# Altium PCB UPS_Charger_v1.PcbDoc
Units mm, origin at the board's own origin, x right, y up, seen from the top; angles counter-clockwise.
Board outline 152.4 x 101.6 mm, 2 copper layers (F.Cu, B.Cu); 78 components, 42 nets, 240 pads, 288 vias.
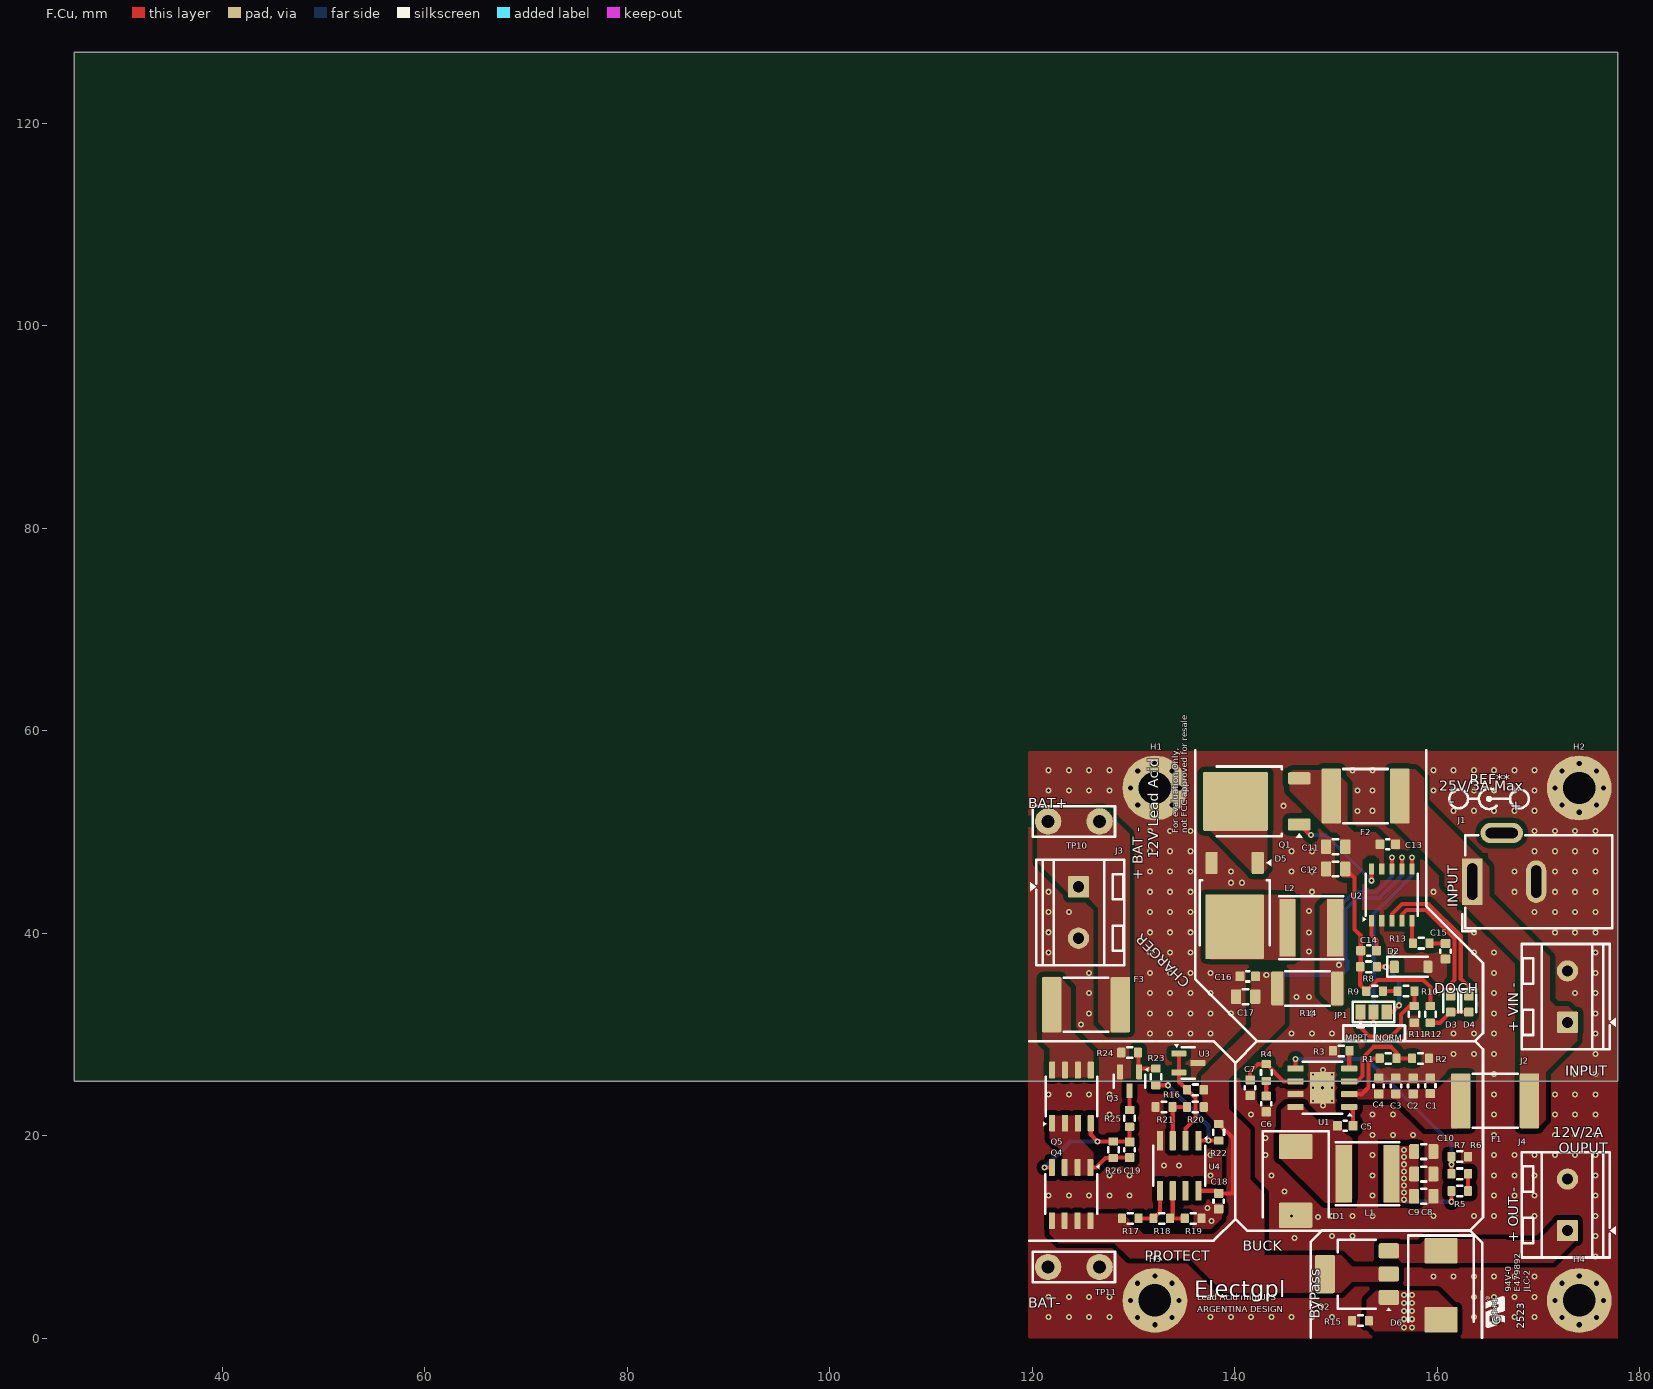
[diagram p0: F.Cu view]
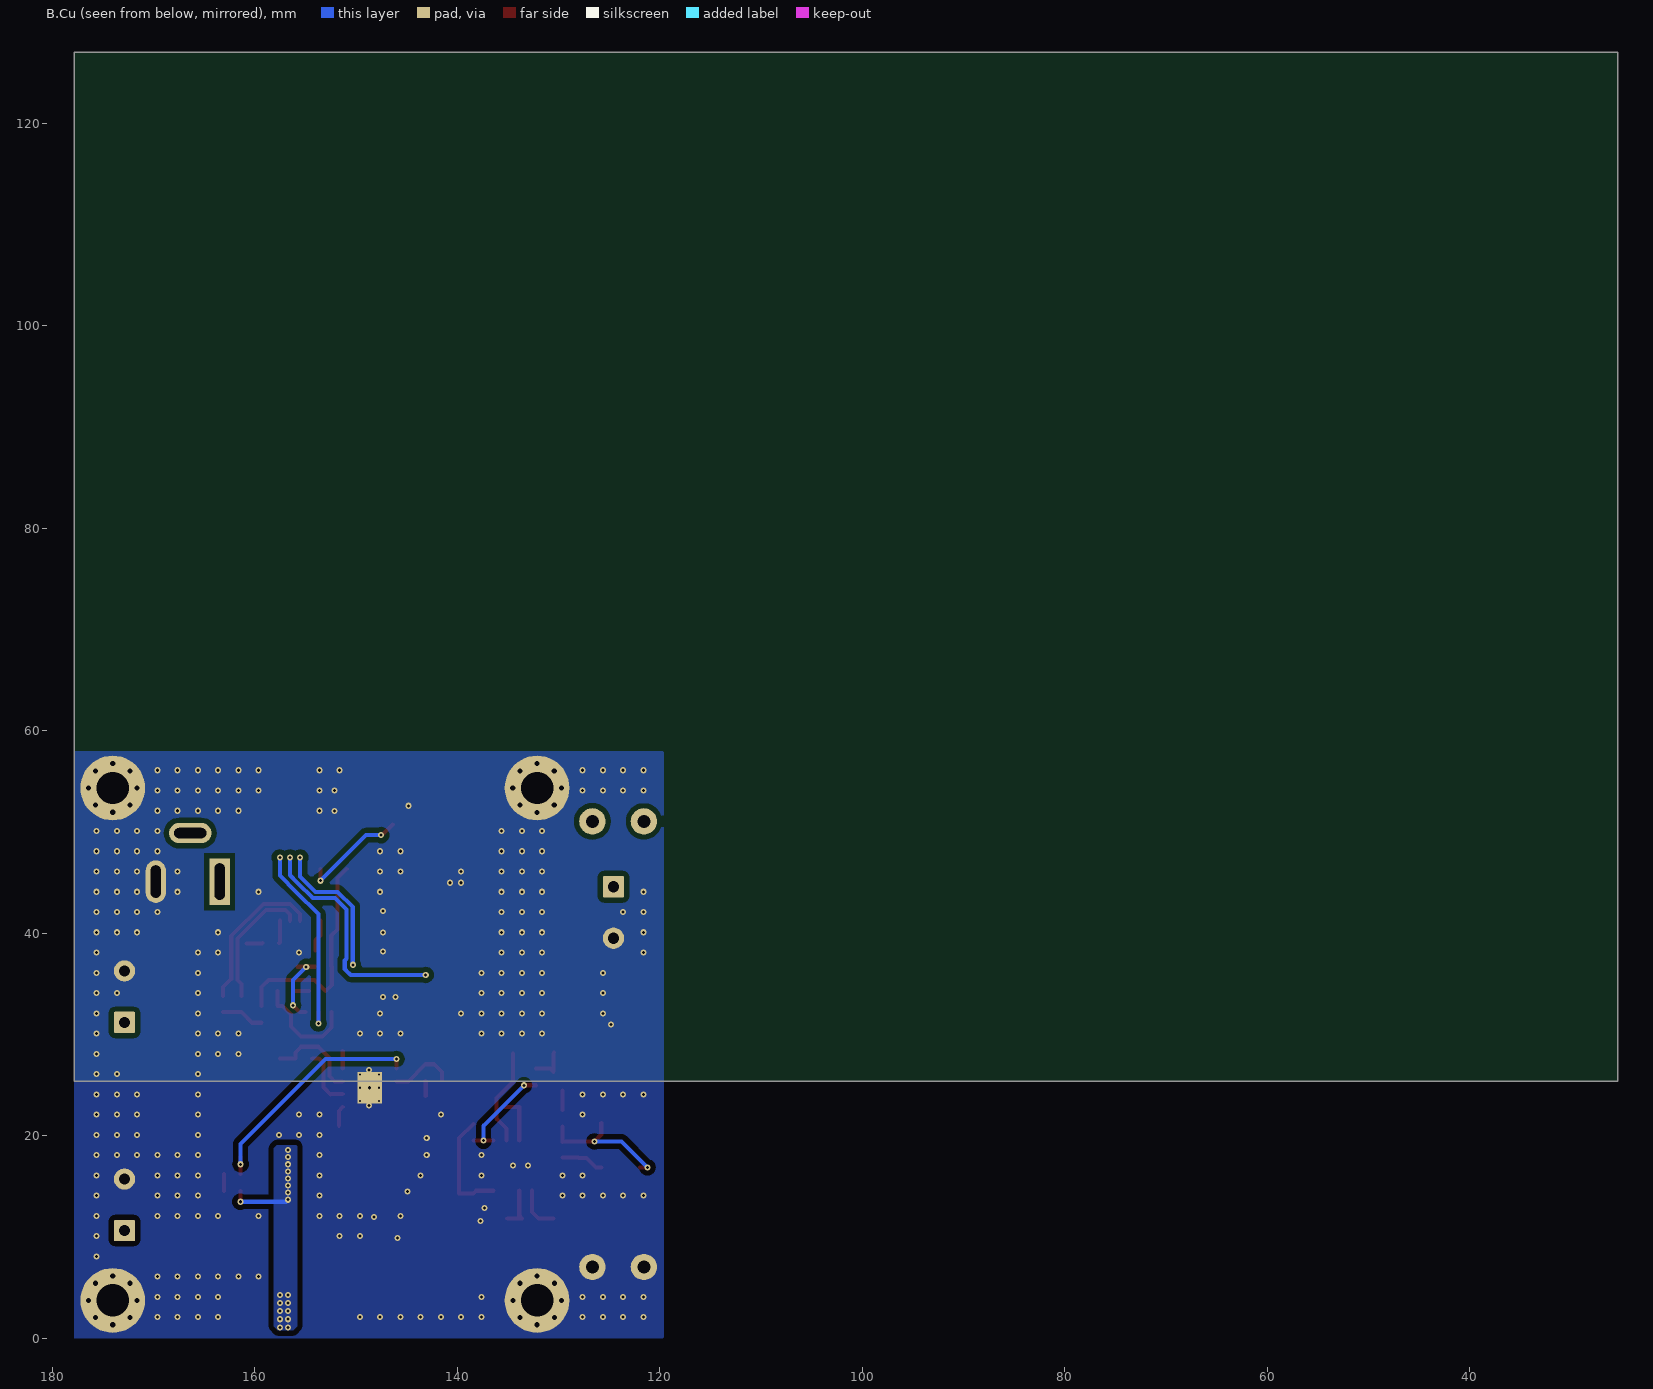
[diagram p1: B.Cu view, seen from below]

## Layer stack, top to bottom
F.Mask: solder mask 0.0102, Solder Resist, Dk 3.5
F.Cu: signal copper 0.0356
Dielectric 1: dielectric 0.32, FR-4, Dk 4.8
B.Cu: signal copper 0.0356
B.Mask: solder mask 0.0102, Solder Resist, Dk 3.5

## Board outline
25.4,25.4 177.8,25.4 177.8,127 25.4,127

## Design rules (kind name [scope] priority, off if disabled: settings)
Clearance "Clearence 0,5_Polygon" [InNamedPolygon('F.Cu-/Battery Protect/BAT+') OR InNamedPolygon('F.Cu-/ByPass/OUTBP') OR InNamedPolygon('F.Cu-Net-(D1-K)') OR InNamedPolygon('F.Cu-Net-(C19-Pad2)') OR InNamedPolygon('F.Cu-Net-(U1-VIN)') OR InNamedPolygon('F.Cu-Net-(F3-Pad2)') OR InNamedPolygon('F.Cu-Net-(D5-K)') OR InNamedPolygon('F.Cu-Net-(Q1-S)') OR InNamedPolygon('F.Cu-/Battery Protect/P+') OR InNamedPolygon('F.Cu-/Buck/VIN') OR InNamedPolygon('F.Cu-Net-(Q1-D)') OR InNamedPolygon('F.Cu-Net-(Q1-S)-1') OR InNamedPolygon('F.Cu-/Buck/VIN-1') OR InNamedPolygon('F.Cu-+12V') OR InNamedPolygon('F.Cu-+12V-1') OR InNamedPolygon('F.Cu-/Battery Protect/P+-1') OR InNamedPolygon('F.Cu-Net-(U2-CSP)') OR InNamedPolygon('F.Cu-/Buck/VIN-2') OR InNamedPolygon('F.Cu-GND') OR InNamedPolygon('B.Cu-GND') OR InNamedPolygon('B.Cu-+12V')] p1: gap=0.5 ignorepadtopadclearanceinfootprint=FALSE
MinimumSolderMaskSliver [All] p1: minsoldermaskwidth=0
PolygonConnect Polygon_B.Cu-+12V_ConnectDirect [IsNamedPolygon('B.Cu-+12V')] p1: connectstyle=Direct reliefconductorwidth=0.254 reliefentries=4 polygonreliefangle="90 Angle" airgapwidth=0.254
PolygonConnect Polygon_B.Cu-GND_ConnectDirect [IsNamedPolygon('B.Cu-GND')] p2: connectstyle=Direct reliefconductorwidth=0.254 reliefentries=4 polygonreliefangle="90 Angle" airgapwidth=0.254
PolygonConnect Polygon_F.Cu-GND_ConnectDirect [IsNamedPolygon('F.Cu-GND')] p3: connectstyle=Direct reliefconductorwidth=0.254 reliefentries=4 polygonreliefangle="90 Angle" airgapwidth=0.254
PolygonConnect Polygon_F.Cu-/Buck/VIN-2_ConnectDirect [IsNamedPolygon('F.Cu-/Buck/VIN-2')] p4: connectstyle=Direct reliefconductorwidth=0.254 reliefentries=4 polygonreliefangle="90 Angle" airgapwidth=0.254
PolygonConnect Polygon_F.Cu-Net-(U2-CSP)_ConnectDirect [IsNamedPolygon('F.Cu-Net-(U2-CSP)')] p5: connectstyle=Direct reliefconductorwidth=0.254 reliefentries=4 polygonreliefangle="90 Angle" airgapwidth=0.254
PolygonConnect "Polygon_F.Cu-/Battery Protect/P+-1_ConnectDirect" [IsNamedPolygon('F.Cu-/Battery Protect/P+-1')] p6: connectstyle=Direct reliefconductorwidth=0.254 reliefentries=4 polygonreliefangle="90 Angle" airgapwidth=0.254
PolygonConnect Polygon_F.Cu-+12V-1_ConnectDirect [IsNamedPolygon('F.Cu-+12V-1')] p7: connectstyle=Direct reliefconductorwidth=0.254 reliefentries=4 polygonreliefangle="90 Angle" airgapwidth=0.254
PolygonConnect Polygon_F.Cu-+12V_ConnectDirect [IsNamedPolygon('F.Cu-+12V')] p8: connectstyle=Direct reliefconductorwidth=0.254 reliefentries=4 polygonreliefangle="90 Angle" airgapwidth=0.254
PolygonConnect Polygon_F.Cu-/Buck/VIN-1_ConnectDirect [IsNamedPolygon('F.Cu-/Buck/VIN-1')] p9: connectstyle=Direct reliefconductorwidth=0.254 reliefentries=4 polygonreliefangle="90 Angle" airgapwidth=0.254
PolygonConnect Polygon_F.Cu-Net-(Q1-S)-1_ConnectDirect [IsNamedPolygon('F.Cu-Net-(Q1-S)-1')] p10: connectstyle=Direct reliefconductorwidth=0.254 reliefentries=4 polygonreliefangle="90 Angle" airgapwidth=0.254
PolygonConnect Polygon_F.Cu-Net-(Q1-D)_ConnectDirect [IsNamedPolygon('F.Cu-Net-(Q1-D)')] p11: connectstyle=Direct reliefconductorwidth=0.254 reliefentries=4 polygonreliefangle="90 Angle" airgapwidth=0.254
PolygonConnect Polygon_F.Cu-/Buck/VIN_ConnectDirect [IsNamedPolygon('F.Cu-/Buck/VIN')] p12: connectstyle=Direct reliefconductorwidth=0.254 reliefentries=4 polygonreliefangle="90 Angle" airgapwidth=0.254
PolygonConnect "Polygon_F.Cu-/Battery Protect/P+_ConnectDirect" [IsNamedPolygon('F.Cu-/Battery Protect/P+')] p13: connectstyle=Direct reliefconductorwidth=0.254 reliefentries=4 polygonreliefangle="90 Angle" airgapwidth=0.254
PolygonConnect Polygon_F.Cu-Net-(Q1-S)_ConnectDirect [IsNamedPolygon('F.Cu-Net-(Q1-S)')] p14: connectstyle=Direct reliefconductorwidth=0.254 reliefentries=4 polygonreliefangle="90 Angle" airgapwidth=0.254
PolygonConnect Polygon_F.Cu-Net-(D5-K)_ConnectDirect [IsNamedPolygon('F.Cu-Net-(D5-K)')] p15: connectstyle=Direct reliefconductorwidth=0.254 reliefentries=4 polygonreliefangle="90 Angle" airgapwidth=0.254
PolygonConnect Polygon_F.Cu-Net-(F3-Pad2)_ConnectDirect [IsNamedPolygon('F.Cu-Net-(F3-Pad2)')] p16: connectstyle=Direct reliefconductorwidth=0.254 reliefentries=4 polygonreliefangle="90 Angle" airgapwidth=0.254
PolygonConnect Polygon_F.Cu-Net-(U1-VIN)_ConnectDirect [IsNamedPolygon('F.Cu-Net-(U1-VIN)')] p17: connectstyle=Direct reliefconductorwidth=0.254 reliefentries=4 polygonreliefangle="90 Angle" airgapwidth=0.254
PolygonConnect Polygon_F.Cu-Net-(C19-Pad2)_ConnectDirect [IsNamedPolygon('F.Cu-Net-(C19-Pad2)')] p18: connectstyle=Direct reliefconductorwidth=0.254 reliefentries=4 polygonreliefangle="90 Angle" airgapwidth=0.254
PolygonConnect Polygon_F.Cu-Net-(D1-K)_ConnectDirect [IsNamedPolygon('F.Cu-Net-(D1-K)')] p19: connectstyle=Direct reliefconductorwidth=0.254 reliefentries=4 polygonreliefangle="90 Angle" airgapwidth=0.254
PolygonConnect Polygon_F.Cu-/ByPass/OUTBP_ConnectDirect [IsNamedPolygon('F.Cu-/ByPass/OUTBP')] p20: connectstyle=Direct reliefconductorwidth=0.254 reliefentries=4 polygonreliefangle="90 Angle" airgapwidth=0.254
PolygonConnect "Polygon_F.Cu-/Battery Protect/BAT+_ConnectDirect" [IsNamedPolygon('F.Cu-/Battery Protect/BAT+')] p21: connectstyle=Direct reliefconductorwidth=0.254 reliefentries=4 polygonreliefangle="90 Angle" airgapwidth=0.254
RoutingVias [All] p1: holewidth=0.711 width=1.27 viastyle="Through Hole" minholewidth=0.711 minwidth=1.27 maxholewidth=0.711 maxwidth=1.27
SilkToSilkClearance [All] p1: silktosilkclearance=0
SilkToSolderMaskClearance [IsPad] p1: minsilkscreentomaskgap=0 clearancetoexposedcopper=TRUE
SolderMaskExpansion [All] p1: expansion=0.102 istentingtop=FALSE
Width [All] p1: maxlimit=10 minlimit=0.254 preferedwidth=0.254 minimp=50.000000 maximp=50.000000 favimp=50.000000
27 further rules are at their usual default settings.

## Components (designator, comment, footprint, x,y, rotation, side; value= is the part's Value field where it differs from the comment)
C1 "Comment" C_0603_1608Metric 159.3,24.958 r270 top value=2u2
C2 "Comment" C_0603_1608Metric 157.6,24.933 r270 top value=2u2
C3 "Comment" C_0603_1608Metric 155.9,24.933 r270 top value=2u2
C4 "Comment" C_0603_1608Metric 154.2,24.933 r270 top value=2u2
C5 "Comment" C_0603_1608Metric 150.9,21 r180 top value=100n
C6 "Comment" C_0603_1608Metric 143.1,23.158 r270 top value=4n7
C7 "Comment" C_0603_1608Metric 141.5,24.758 r270 top value=47p
C8 "Comment" C_0805_2012Metric 158.65,14.038 r180 top value=47u
C9 "Comment" C_0805_2012Metric 158.65,16.238 r180 top value=47u
C10 "Comment" C_0805_2012Metric 158.65,18.458 r180 top value=47u
C11 "Comment" C_0805_2012Metric 149.95,48.558 r180 top value=47u
C12 "Comment" C_0805_2012Metric 149.95,46.358 r180 top value=47u
C13 "Comment" C_0603_1608Metric 155.1,48.8 r0 top value=100n
C14 "Comment" C_0603_1608Metric 153.2,38.3 r0 top value=100n
C15 "Comment" C_0603_1608Metric 160.8,38.233 r270 top value=220n
C16 "Comment" C_0603_1608Metric 141.262,35.758 r180 top value=100n
C17 "Comment" C_0805_2012Metric 141.062,33.758 r180 top value=47u
C18 "Comment" C_0603_1608Metric 138.4,13.558 r270 top value=100n
C19 "Comment" C_0603_1608Metric 129.6,18.633 r270 top value=10n
D1 "Comment" D_SMC 146,15.557 r270 top value=SS54
D2 "Comment" D_SOD-123 157.4,36.7 r0 top value=5V1
D3 "Comment" LED_0603_1608Metric 161.3,33.013 r270 top value=LED
D4 "Comment" LED_0603_1608Metric 163.1,33.013 r270 top value=LED
D5 "Comment" TO-252-2 139.978,41.918 r270 top value=MBRD20100CT
D6 "Comment" D_SMC 160.35,5.258 r270 top value=SS54
F1 "Comment" Fuse_2920_7451Metric 165.7,23.458 r180 top value=500/24N
F2 "Comment" Fuse_2920_7451Metric 152.9,53.558 r180 top value=500/24N
F3 "Comment" Fuse_2920_7451Metric 125.3,32.958 r180 top value=500/24N
G*** "Comment" "Recognized Component very small" 165.7,2.6 r90 top value=LOGO
H1 "Comment" MountingHole_3.2mm_M3_Pad_Via 132.103,54.355 r0 top value=MountingHole_Pad
H2 "Comment" MountingHole_3.2mm_M3_Pad_Via 174,54.358 r0 top value=MountingHole_Pad
H3 "Comment" MountingHole_3.2mm_M3_Pad_Via 132.1,3.758 r0 top value=MountingHole_Pad
H4 "Comment" MountingHole_3.2mm_M3_Pad_Via 174,3.758 r0 top value=MountingHole_Pad
J1 "Comment" BarrelJack_GCT_DCJ200-10-A_Horizontal 163.45,45.108 r90 top value=Barrel_Jack_Switch
J2 "Comment" TerminalBlock_RND_205-00232_1x02_P5.08mm_Horizontal 172.842,31.213 r90 top value=Screw_Terminal_01x02
J3 "Comment" TerminalBlock_RND_205-00232_1x02_P5.08mm_Horizontal 124.558,44.603 r270 top value=Screw_Terminal_01x02
J4 "Comment" TerminalBlock_RND_205-00232_1x02_P5.08mm_Horizontal 172.842,10.658 r90 top value=Screw_Terminal_01x02
JP1 "Comment" SolderJumper-3_P1.3mm_Open_Pad1.0x1.5mm 153.7,32.243 r0 top value=MPPT
L1 "Comment" L_Taiyo-Yuden_NR-60xx 153.1,16.258 r0 top value=10u
L2 "Comment" L_Taiyo-Yuden_NR-60xx 147.55,40.558 r0 top value=10u
Q1 "Comment" TO-252-2 141.317,53.03 r180 top value=DMP4051LK3-13
Q2 "Comment" SOT-223-3_TabPin2 152.05,6.358 r180 top value=NTF6P02
Q3 "Comment" SOT-23 129.6,25.395 r270 top value=2N7002
Q4 "Comment" SOP-8_3.9x4.9mm_P1.27mm 123.83,14.258 r270 top value=AO4407
Q5 "Comment" SOP-8_3.9x4.9mm_P1.27mm 123.865,23.882 r90 top value=AO4407
R1 "Comment" R_0603_1608Metric 155.125,27.658 r0 top value=442k
R2 "Comment" R_0603_1608Metric 158.325,27.658 r0 top value=90k9
R3 "Comment" R_0603_1608Metric 150.5,28.4 r180 top value=243k
R4 "Comment" R_0603_1608Metric 143.1,26.258 r270 top value=16k9
R5 "Comment" R_0603_1608Metric 162.2,14.558 r0 top value=49R9
R6 "Comment" R_0603_1608Metric 162.2,16.258 r180 top value=33k
R7 "Comment" R_0603_1608Metric 162.2,17.958 r0 top value=2k2
R8 "Comment" R_0603_1608Metric 153.2,36.7 r0 top value=100k
R9 "Comment" R_0603_1608Metric 153.8,34.3 r0 top value=1M
R10 "Comment" R_0603_1608Metric 156.9,34.3 r0 top value=360k
R11 "Comment" R_0603_1608Metric 157.7,32 r270 top value=100k
R12 "Comment" R_0603_1608Metric 159.3,32 r270 top value=10k
R13 "Comment" R_0603_1608Metric 158.4,39.033 r0 top value=120R
R14 "Comment" R_2512_6332Metric 147.162,34.558 r180 top value=0R12
R15 "Comment" R_0603_1608Metric 152.4,1.758 r0 top value=100k
R16 "Comment" R_0603_1608Metric 136.1,24.558 r180 top value=10k
R17 "Comment" R_0603_1608Metric 129.675,11.858 r0 top value=47k
R18 "Comment" R_0603_1608Metric 132.775,11.858 r0 top value=47k
R19 "Comment" R_0603_1608Metric 135.875,11.858 r0 top value=47k
R20 "Comment" R_0603_1608Metric 136.1,22.858 r180 top value=15k
R21 "Comment" R_0603_1608Metric 133,22.858 r180 top value=4k7
R22 "Comment" R_0603_1608Metric 138.4,20.358 r270 top value=10k
R23 "Comment" R_0603_1608Metric 132.2,25.833 r90 top value=10k
R24 "Comment" R_0603_1608Metric 129.6,28.233 r180 top value=10k
R25 "Comment" R_0603_1608Metric 129.6,21.733 r90 top value=10R
R26 "Comment" R_0603_1608Metric 128,18.633 r270 top value=10k
REF** "Comment" Symbol_Barrel_Polarity 165.1,53.358 r0 top value=Symbol_Barrel_Polarity
TP10 "Comment" TestPoint_Bridge_Pitch5.08mm_Drill1.3mm 121.56,51.058 r0 top value=TestPoint_Alt
TP11 "Comment" TestPoint_Bridge_Pitch5.08mm_Drill1.3mm 121.56,7.058 r0 top value=TestPoint_Alt
U1 "Comment" HSOP-8-1EP_3.9x4.9mm_P1.27mm_EP2.41x3.1mm_ThermalVias 148.645,24.758 r180 top value=TPS54360DDA
U2 "Comment" SSOP-10_3.9x4.9mm_P1.00mm 155.5,43.8 r90 top value=CN3767
U3 "Comment" SOT-23 135.4,27.2 r0 top value=TL431AIDBZR
U4 "Comment" SOIC-8_3.9x4.9mm_P1.27mm 134.5,17.058 r270 top value=LM393

## Footprints (in the part's own frame and the unit in brackets; to place one, negate y for a bottom-side part, rotate by r counter-clockwise, add the part's x,y. Pads: shape width x height; smd on the part's side, far side on the other; paste and mask are expansions set on the pad)
BarrelJack_GCT_DCJ200-10-A_Horizontal [mm]
  rect 4.6x2 hole 1 slot 3.6 at 0 deg mask+0: 1(0,0)
  rrect100% 4.2x2 hole 1 slot 3.2 at 0 deg mask+0: 2(0,-6.3)
  rrect100% 2x4.2 hole 3.2 slot 1 at 0 deg mask+0: 3(4.8,-2.9)
  silkscreen extent -4.9,-13.8 4.6,1
C_0603_1608Metric [mm]
  rrect25% 0.9x0.95 smd mask+0: 1(-0.775,0) 2(0.775,0)
  silkscreen extent -0.14,-0.51 0.14,0.51
C_0805_2012Metric [mm]
  rrect25% 1x1.45 smd mask+0: 1(-0.95,0) 2(0.95,0)
  silkscreen extent -0.26,-0.73 0.26,0.73
D_SMC [mm]
  rrect10% 2.5x3.3 smd mask+0: 1(-3.4,0) 2(3.4,0)
  silkscreen extent -4.91,-3.25 3.6,3.25
D_SOD-123 [mm]
  rrect25% 0.9x1.2 smd mask+0: 1(-1.65,0) 2(1.65,0)
  silkscreen extent -2.36,-1 1.65,1
Fuse_2920_7451Metric [mm]
  rrect13% 1.925x5.45 smd mask+0: 1(-3.387,0) 2(3.387,0)
  silkscreen extent -2.2,-2.67 2.2,2.67
HSOP-8-1EP_3.9x4.9mm_P1.27mm_EP2.41x3.1mm_ThermalVias [mm]
  rrect25% 1.6x0.6 smd mask+0: 1(-2.65,1.905) 2(-2.65,0.635) 3(-2.65,-0.635) 4(-2.65,-1.905) 5(2.65,-1.905) 6(2.65,-0.635) 7(2.65,0.635) 8(2.65,1.905)
  round 0.5 hole 0.2 mask+0: 9(-0.955,1.3) 9(-0.955,0) 9(-0.955,-1.3) 9(0.955,1.3) 9(0.955,0) 9(0.955,-1.3)
  rect 2.41x3.1 smd paste-3.1 mask+0: 9(0,0)
  rect 2.41x3.1 smd far side paste-3.1 mask-3.1: 9(0,0)
  rrect25% 0.97x1.25 on Top Paste mask-1.25: Un1(-0.6,0.775) Un2(-0.6,-0.775) Un3(0.6,0.775) Un4(0.6,-0.775)
  silkscreen extent -2.94,-2.56 1.95,2.8
L_Taiyo-Yuden_NR-60xx [mm]
  rect 1.6x5.7 smd mask+0: 1(-2.35,0) 2(2.35,0)
  silkscreen extent -3.15,-3.1 3.15,3.1
LED_0603_1608Metric [mm]
  rrect25% 0.875x0.95 smd mask+0: 1(-0.787,0) 2(0.787,0)
  silkscreen extent -1.49,-0.73 0.8,0.73
MountingHole_3.2mm_M3_Pad_Via [mm]
  round 0.8 hole 0.5 mask+0: 1(-2.4,0) 1(-1.697,-1.697) 1(-1.697,1.697) 1(0,-2.4) 1(0,2.4) 1(1.697,-1.697) 1(1.697,1.697) 1(2.4,0)
  round 6.4 hole 3.2 mask+0: 1(0,0)
R_0603_1608Metric [mm]
  rrect25% 0.8x0.95 smd mask+0: 1(-0.825,0) 2(0.825,0)
  silkscreen extent -0.24,-0.52 0.24,0.52
R_2512_6332Metric [mm]
  rrect20% 1.225x3.35 smd mask+0: 1(-2.963,0) 2(2.963,0)
  silkscreen extent -2.18,-1.71 2.18,1.71
"Recognized Component very small" [mm]
  silkscreen extent -1.56,-0.94 1.56,0.94
SOIC-8_3.9x4.9mm_P1.27mm [mm]
  rrect25% 1.95x0.6 smd mask+0: 1(-2.475,1.905) 2(-2.475,0.635) 3(-2.475,-0.635) 4(-2.475,-1.905) 5(2.475,-1.905) 6(2.475,-0.635) 7(2.475,0.635) 8(2.475,1.905)
  silkscreen extent -2.94,-2.56 1.95,2.8
SolderJumper-3_P1.3mm_Open_Pad1.0x1.5mm [mm]
  rect 1x1.5 smd paste-1.5 mask+0: 1(-1.3,0) 2(0,0) 3(1.3,0)
  silkscreen extent -2.05,-1.5 2.05,1
SOP-8_3.9x4.9mm_P1.27mm [mm]
  rrect25% 1.65x0.6 smd mask+0: 1(-2.625,1.905) 2(-2.625,0.635) 3(-2.625,-0.635) 4(-2.625,-1.905) 5(2.625,-1.905) 6(2.625,-0.635) 7(2.625,0.635) 8(2.625,1.905)
  silkscreen extent -2.94,-2.56 1.95,2.8
SOT-23 [mm]
  rrect25% 1.475x0.6 smd mask+0: 1(-0.937,0.95) 2(-0.937,-0.95) 3(0.937,0)
  silkscreen extent -1.4,-1.56 0.65,1.84
SOT-223-3_TabPin2 [mm]
  rrect25% 2x1.5 smd mask+0: 1(-3.15,2.3) 2(-3.15,0) 3(-3.15,-2.3)
  rrect25% 2x3.8 smd mask+0: 2(3.15,0)
  silkscreen extent -3.37,-3.41 1.91,3.64
SSOP-10_3.9x4.9mm_P1.00mm [mm]
  rect 1.1x0.51 smd mask+0: 1(-2.55,2) 2(-2.55,1) 3(-2.55,0) 4(-2.55,-1) 5(-2.55,-2) 6(2.55,-2) 7(2.55,-1) 8(2.55,0) 9(2.55,1) 10(2.55,2)
  silkscreen extent -2.64,-2.57 2.07,2.86
Symbol_Barrel_Polarity [mm]
  silkscreen extent -3.92,-1.08 3.92,0.93
TerminalBlock_RND_205-00232_1x02_P5.08mm_Horizontal [mm]
  rrect12% 2.1x2.1 hole 1.1 mask+0: 1(0,0)
  round 2.1 hole 1.1 mask+0: 2(5.08,0)
  silkscreen extent -2.66,-4.78 7.74,4.52
TestPoint_Bridge_Pitch5.08mm_Drill1.3mm [mm]
  round 2.6 hole 1.3 mask+0: 1(0,0) 1(5.08,0)
  silkscreen extent -1.5,-1.5 6.6,1.5
TO-252-2 [mm]
  rrect21% 2.2x1.2 smd mask+0: 1(-5.04,2.28) 3(-5.04,-2.28)
  rrect4% 6.4x5.8 smd paste-6.4 mask+0: 2(1.26,0)
  rrect9% 3.05x2.75 on Top Paste mask-3.05: Un1(-0.415,1.525) Un2(-0.415,-1.525) Un3(2.935,1.525) Un4(2.935,-1.525)
  silkscreen extent -5.38,-3.45 3.11,3.61

## Part data
C1 C2 C3 C4: library part C_0603_1608Metric, "Capacitor SMD 0603 (1608 Metric), square (rectangular) end terminal, IPC-7351 nominal, (Body size source: IPC-SM-782 page 76, https://www.pcb-3d.com/wordpress/wp-content/uploads/ipc-sm-782a_amendment_1_and_2.pdf), generated with kicad-footprint-generator", LCSC=C913904, MFR P/N=CL10A225KB8NNNC, Description="Unpolarized capacitor", Absolute minimum=100V, Reference MFG P/N=C6119935, ki_fp_filters=C_*
C5 C13 C14 C16 C18: library part C_0603_1608Metric, "Capacitor SMD 0603 (1608 Metric), square (rectangular) end terminal, IPC-7351 nominal, (Body size source: IPC-SM-782 page 76, https://www.pcb-3d.com/wordpress/wp-content/uploads/ipc-sm-782a_amendment_1_and_2.pdf), generated with kicad-footprint-generator", LCSC=C1591, MFR P/N=CL10B104KB8NNNC, ki_fp_filters=C_*
  C5: Description="Unpolarized capacitor", Absolute minimum=50V, Reference MFG P/N=C5142567
  C13 C14 C16: Internal P/N=C100N-50-0603
  C18: Description="Unpolarized capacitor, small symbol"
C6: library part C_0603_1608Metric, "Capacitor SMD 0603 (1608 Metric), square (rectangular) end terminal, IPC-7351 nominal, (Body size source: IPC-SM-782 page 76, https://www.pcb-3d.com/wordpress/wp-content/uploads/ipc-sm-782a_amendment_1_and_2.pdf), generated with kicad-footprint-generator", LCSC=C1621, MFR P/N=CL10B472KB8NNNC, Description="Unpolarized capacitor", Absolute minimum=50V, Reference MFG P/N=C7503510, ki_fp_filters=C_*
C7: library part C_0603_1608Metric, "Capacitor SMD 0603 (1608 Metric), square (rectangular) end terminal, IPC-7351 nominal, (Body size source: IPC-SM-782 page 76, https://www.pcb-3d.com/wordpress/wp-content/uploads/ipc-sm-782a_amendment_1_and_2.pdf), generated with kicad-footprint-generator", LCSC=C1671, MFR P/N=CL10C470JB8NNNC, Description="Unpolarized capacitor", Absolute minimum=50V, Reference MFG P/N=C466230, ki_fp_filters=C_*
C8 C9 C10 C11 C12 C17: library part C_0805_2012Metric, "Capacitor SMD 0805 (2012 Metric), square (rectangular) end terminal, IPC-7351 nominal, (Body size source: IPC-SM-782 page 76, https://www.pcb-3d.com/wordpress/wp-content/uploads/ipc-sm-782a_amendment_1_and_2.pdf, https://docs.google.com/spreadsheets/d/1BsfQQcO9C6DZCsRaXUlFlo91Tg2WpOkGARC1WS5S8t0/edit?usp=sharing), generated with kicad-footprint-generator", LCSC=C602037, MFR P/N=CL21A226MAYNNNE
  C8 C9 C10: Description="Unpolarized capacitor", Absolute minimum=10V, Reference MFG P/N=C19103846, ki_fp_filters=C_*
  C11 C12 C17: Internal P/N=C47U-25-5_5.4, ki_fp_filters=CP_*
C15: library part C_0603_1608Metric, "Capacitor SMD 0603 (1608 Metric), square (rectangular) end terminal, IPC-7351 nominal, (Body size source: IPC-SM-782 page 76, https://www.pcb-3d.com/wordpress/wp-content/uploads/ipc-sm-782a_amendment_1_and_2.pdf), generated with kicad-footprint-generator", LCSC=C64705, MFR P/N=CL10B224KB8NNNC, Internal P/N=C220N-50-0603, ki_fp_filters=C_*
C19: library part C_0603_1608Metric, "Capacitor SMD 0603 (1608 Metric), square (rectangular) end terminal, IPC-7351 nominal, (Body size source: IPC-SM-782 page 76, https://www.pcb-3d.com/wordpress/wp-content/uploads/ipc-sm-782a_amendment_1_and_2.pdf), generated with kicad-footprint-generator", LCSC=C1589, MFR P/N=CL10B103KB8NNNC, Description="Unpolarized capacitor, small symbol", ki_fp_filters=C_*
D1 D6: library part D_SMC, "Diode SMC (DO-214AB)", LCSC=C5199108, MFR P/N=SS54, Datasheet=http://www.jameco.com/Jameco/Products/ProdDS/1538777.pdf, Description="40V 2A Schottky Barrier Rectifier Diode, SMB", Absolute minimum="40V 5A", Reference MFG P/N=C5200096, ki_fp_filters=D*SMB*
D2: library part D_SOD-123, "SOD-123", LCSC=C66198, MFR P/N=MMSZ5231BT1G, Internal P/N=DZ-5.1, ki_fp_filters="TO-???* *_Diode_* *SingleDiode* D_*"
D3 D4: library part LED_0603_1608Metric, "LED SMD 0603 (1608 Metric), square (rectangular) end terminal, IPC-7351 nominal, (Body size source: http://www.tortai-tech.com/upload/download/2011102023233369053.pdf), generated with kicad-footprint-generator", LCSC=C965802, MFR P/N=XL-1608UYC-06, ki_fp_filters="LED* LED_SMD:* LED_THT:*"
  D3: Internal P/N=DL-GREEN-0603
  D4: Internal P/N=DL-RED-0603
D5: library part TO-252-2, "TO-252/DPAK SMD package, http://www.infineon.com/cms/en/product/packages/PG-TO252/PG-TO252-3-1/", LCSC=C460890, MFR P/N=MBRD20100CT-13, Description="20A SCHOTTKY BARRIER RECTIFIER"
F1 F2 F3: library part Fuse_2920_7451Metric, "Fuse SMD 2920 (7451 Metric), square (rectangular) end terminal, IPC-7351 nominal, (Body size from: http://www.megastar.com/products/fusetronic/polyswitch/PDF/smd2920.pdf), generated with kicad-footprint-generator", LCSC=C6165172, MFR P/N=SMD2920-500/24N, Description="24V 5A 40A 10A 2920 Resettable Fuses ROHS", Absolute minimum="16V 3A", Reference MFG P/N=C6165172, ki_fp_filters="*polyfuse* *PTC*"
G***: library part "Recognized Component very small"
H1 H2 H3 H4: library part MountingHole_3.2mm_M3_Pad_Via, "Mounting Hole 3.2mm, M3, generated by kicad-footprint-generator mountinghole.py", Description="Mounting Hole with connection", ki_fp_filters=MountingHole*Pad*
J1: library part BarrelJack_GCT_DCJ200-10-A_Horizontal, "Barrel jack connector (5.5 mm outer diameter, 2.05 inner diameter ), https://gct.co/files/drawings/dcj200-10.pdf", LCSC=C194407, MFR P/N=DC-470-2.1GP, Description="DC Barrel Jack with an internal switch", ki_fp_filters=BarrelJack*
J2 J3 J4: library part TerminalBlock_RND_205-00232_1x02_P5.08mm_Horizontal, "terminal block RND 205-00232, 2 pins, pitch 5.08mm, size 10.2x8.45mm, drill diameter 1.1mm, pad diameter 2.1mm, http://cdn-reichelt.de/documents/datenblatt/C151/RND_205-00232_DB_EN.pdf, script-generated using https://gitlab.com/kicad/libraries/kicad-footprint-generator/-/tree/master/scripts/TerminalBlock_RND", LCSC=C8465, MFR P/N=WJ500V-5.08-2P, Description="Generic screw terminal, single row, 01x02, script generated (kicad-library-utils/schlib/autogen/connector/)", ki_fp_filters=TerminalBlock*:*
JP1: library part SolderJumper-3_P1.3mm_Open_Pad1.0x1.5mm, "SMD Solder 3-pad Jumper, 1x1.5mm Pads, 0.3mm gap, open", ki_fp_filters="Jumper* TestPoint*3Pads* TestPoint*Bridge*"
L1 L2: library part L_Taiyo-Yuden_NR-60xx, "Inductor, Taiyo Yuden, NR series, Taiyo-Yuden_NR-60xx, 6.0mmx6.0mm", LCSC=C360734, MFR P/N=VLS6045EX-100M, ki_fp_filters="Choke_* *Coil* Inductor_* L_*"
  L1: Description="Inductor with ferrite core", Absolute minimum=5A, Reference MFG P/N=C2849537
  L2: Internal P/N=L10U-10-12_12_6
Q1: library part TO-252-2, "TO-252/DPAK SMD package, http://www.infineon.com/cms/en/product/packages/PG-TO252/PG-TO252-3-1/", LCSC=C397952, MFR P/N=DMP4051LK3-13, Datasheet=http://www.jaolen.com/images/pdf/QM6015D.pdf, Description="-35A Id, -60V Vds, P-Channel Power MOSFET, 25mOhm Ron, 25.0nC Qg (typ), TO252", ki_fp_filters=TO?252*
Q2: library part SOT-223-3_TabPin2, "module CMS SOT223 4 pins", LCSC Part=C154901, LCSC=C558214, MFR P/N=NTF6P02T3G-VB, Datasheet=https://www.lcsc.com/datasheet/lcsc_datasheet_1808280023_Diodes-Incorporated-DMP6023LE-13_C154901.pdf, Description="60V 2W 28mΩ@10V,5A 3V@250uA 1 Piece P-Channel SOT-223-4 MOSFETs ROHS"
Q3: library part SOT-23, "SOT, 3 Pin (JEDEC TO-236 Var AB https://www.jedec.org/document_search?search_api_views_fulltext=TO-236), generated with kicad-footprint-generator ipc_gullwing_generator.py", LCSC=C65189, MFR P/N=2N7002,215, Datasheet=https://www.onsemi.com/pub/Collateral/NDS7002A-D.PDF, Description="0.115A Id, 60V Vds, N-Channel MOSFET, SOT-23", ki_fp_filters=SOT?23*
Q4 Q5: library part SOP-8_3.9x4.9mm_P1.27mm, "SOP, 8 Pin (http://www.macronix.com/Lists/Datasheet/Attachments/7534/MX25R3235F,%20Wide%20Range,%2032Mb,%20v1.6.pdf#page=79), generated with kicad-footprint-generator ipc_gullwing_generator.py", LCSC=C2841482, MFR P/N=AO4407A, Datasheet=http://www.infineon.com/dgdl/irf7404.pdf?fileId=5546d462533600a4015355fa2b5b1b9e, Description="-6.7A Id, -20V Vds, P-Channel HEXFET Power MOSFET, SO-8", ki_fp_filters=SOIC*3.9x4.9mm*P1.27mm*
R1: library part R_0603_1608Metric, "Resistor SMD 0603 (1608 Metric), square (rectangular) end terminal, IPC-7351 nominal, (Body size source: IPC-SM-782 page 72, https://www.pcb-3d.com/wordpress/wp-content/uploads/ipc-sm-782a_amendment_1_and_2.pdf), generated with kicad-footprint-generator", LCSC=C23175, MFR P/N=0603WAF4423T5E, Description="Resistor, small US symbol", Absolute minimum="442k 0402", Reference MFG P/N=C3016035, ki_fp_filters=R_*
R2: library part R_0603_1608Metric, "Resistor SMD 0603 (1608 Metric), square (rectangular) end terminal, IPC-7351 nominal, (Body size source: IPC-SM-782 page 72, https://www.pcb-3d.com/wordpress/wp-content/uploads/ipc-sm-782a_amendment_1_and_2.pdf), generated with kicad-footprint-generator", LCSC=C2930136, MFR P/N=FRC0603F9092TS, Description="Resistor, small US symbol", Absolute minimum="90k9 0402", Reference MFG P/N=C26989, ki_fp_filters=R_*
R3: library part R_0603_1608Metric, "Resistor SMD 0603 (1608 Metric), square (rectangular) end terminal, IPC-7351 nominal, (Body size source: IPC-SM-782 page 72, https://www.pcb-3d.com/wordpress/wp-content/uploads/ipc-sm-782a_amendment_1_and_2.pdf), generated with kicad-footprint-generator", LCSC=C7467321, MFR P/N=FRC0603F2433TS, Description="Resistor, small US symbol", Absolute minimum="243k 0402", Reference MFG P/N=C2998149, ki_fp_filters=R_*
R4: library part R_0603_1608Metric, "Resistor SMD 0603 (1608 Metric), square (rectangular) end terminal, IPC-7351 nominal, (Body size source: IPC-SM-782 page 72, https://www.pcb-3d.com/wordpress/wp-content/uploads/ipc-sm-782a_amendment_1_and_2.pdf), generated with kicad-footprint-generator", LCSC=C2933158, MFR P/N=FRC0603F1692TS, Description="Resistor, small US symbol", Absolute minimum="16k9 0402", Reference MFG P/N=C2929989, ki_fp_filters=R_*
R5: library part R_0603_1608Metric, "Resistor SMD 0603 (1608 Metric), square (rectangular) end terminal, IPC-7351 nominal, (Body size source: IPC-SM-782 page 72, https://www.pcb-3d.com/wordpress/wp-content/uploads/ipc-sm-782a_amendment_1_and_2.pdf), generated with kicad-footprint-generator", LCSC=C2930110, MFR P/N=FRC0603F49R9TS, Description="Resistor, small US symbol", Absolute minimum="49R9 0402", Reference MFG P/N=C25120, ki_fp_filters=R_*
R6: library part R_0603_1608Metric, "Resistor SMD 0603 (1608 Metric), square (rectangular) end terminal, IPC-7351 nominal, (Body size source: IPC-SM-782 page 72, https://www.pcb-3d.com/wordpress/wp-content/uploads/ipc-sm-782a_amendment_1_and_2.pdf), generated with kicad-footprint-generator", LCSC=C2907153, MFR P/N="FRC0603J333 TS", Description="Resistor, small US symbol", Absolute minimum="53k6 0402", Reference MFG P/N=C5153961, ki_fp_filters=R_*
R7: library part R_0603_1608Metric, "Resistor SMD 0603 (1608 Metric), square (rectangular) end terminal, IPC-7351 nominal, (Body size source: IPC-SM-782 page 72, https://www.pcb-3d.com/wordpress/wp-content/uploads/ipc-sm-782a_amendment_1_and_2.pdf), generated with kicad-footprint-generator", LCSC=C2907117, MFR P/N="FRC0603J222 TS", Description="Resistor, small US symbol", Absolute minimum="10k2 0402", Reference MFG P/N=C3015976, ki_fp_filters=R_*
R8 R11: library part R_0603_1608Metric, "Resistor SMD 0603 (1608 Metric), square (rectangular) end terminal, IPC-7351 nominal, (Body size source: IPC-SM-782 page 72, https://www.pcb-3d.com/wordpress/wp-content/uploads/ipc-sm-782a_amendment_1_and_2.pdf), generated with kicad-footprint-generator", LCSC=C2907088, MFR P/N="FRC0603J104 TS", Internal P/N=R100K-0603-1, ki_fp_filters=R_*
  R11: Aux=Rc
R9: library part R_0603_1608Metric, "Resistor SMD 0603 (1608 Metric), square (rectangular) end terminal, IPC-7351 nominal, (Body size source: IPC-SM-782 page 72, https://www.pcb-3d.com/wordpress/wp-content/uploads/ipc-sm-782a_amendment_1_and_2.pdf), generated with kicad-footprint-generator", LCSC=C2907003, MFR P/N=FRC0603F1004TS, Aux=Ra, Internal P/N=R1M-0603-1, ki_fp_filters=R_*
R10: library part R_0603_1608Metric, "Resistor SMD 0603 (1608 Metric), square (rectangular) end terminal, IPC-7351 nominal, (Body size source: IPC-SM-782 page 72, https://www.pcb-3d.com/wordpress/wp-content/uploads/ipc-sm-782a_amendment_1_and_2.pdf), generated with kicad-footprint-generator", LCSC=C2907029, MFR P/N=FRC0603F3603TS, Aux=Rb, Internal P/N=R360K-0603-1, ki_fp_filters=R_*
R12 R16 R22 R23 R24 R26: library part R_0603_1608Metric, "Resistor SMD 0603 (1608 Metric), square (rectangular) end terminal, IPC-7351 nominal, (Body size source: IPC-SM-782 page 72, https://www.pcb-3d.com/wordpress/wp-content/uploads/ipc-sm-782a_amendment_1_and_2.pdf), generated with kicad-footprint-generator", LCSC=C2930027, MFR P/N="FRC0603J103 TS", ki_fp_filters=R_*
  R12: Internal P/N=R10K-0603-1
  R16 R22 R23 R24 R26: Description="Resistor, small US symbol"
R13: library part R_0603_1608Metric, "Resistor SMD 0603 (1608 Metric), square (rectangular) end terminal, IPC-7351 nominal, (Body size source: IPC-SM-782 page 72, https://www.pcb-3d.com/wordpress/wp-content/uploads/ipc-sm-782a_amendment_1_and_2.pdf), generated with kicad-footprint-generator", LCSC=C2907096, MFR P/N="FRC0603J121 TS", Internal P/N=R120-0603-1, ki_fp_filters=R_*
R14: library part R_2512_6332Metric, "Resistor SMD 2512 (6332 Metric), square (rectangular) end terminal, IPC-7351 nominal, (Body size source: IPC-SM-782 page 72, https://www.pcb-3d.com/wordpress/wp-content/uploads/ipc-sm-782a_amendment_1_and_2.pdf), generated with kicad-footprint-generator", LCSC=C875871, MFR P/N=PT2512FK-7W0R12L, Internal P/N=R0.03-2512_2W-1, ki_fp_filters=R_*
R15: library part R_0603_1608Metric, "Resistor SMD 0603 (1608 Metric), square (rectangular) end terminal, IPC-7351 nominal, (Body size source: IPC-SM-782 page 72, https://www.pcb-3d.com/wordpress/wp-content/uploads/ipc-sm-782a_amendment_1_and_2.pdf), generated with kicad-footprint-generator", LCSC Part=C99198, LCSC=C2907088, MFR P/N="FRC0603J104 TS", Description="Resistor, small US symbol", ki_fp_filters=R_*
R17 R18 R19: library part R_0603_1608Metric, "Resistor SMD 0603 (1608 Metric), square (rectangular) end terminal, IPC-7351 nominal, (Body size source: IPC-SM-782 page 72, https://www.pcb-3d.com/wordpress/wp-content/uploads/ipc-sm-782a_amendment_1_and_2.pdf), generated with kicad-footprint-generator", LCSC=C2907042, MFR P/N=FRC0603F4702TS, Description="Resistor, small US symbol", ki_fp_filters=R_*
R20: library part R_0603_1608Metric, "Resistor SMD 0603 (1608 Metric), square (rectangular) end terminal, IPC-7351 nominal, (Body size source: IPC-SM-782 page 72, https://www.pcb-3d.com/wordpress/wp-content/uploads/ipc-sm-782a_amendment_1_and_2.pdf), generated with kicad-footprint-generator", LCSC=C2906995, MFR P/N=FRC0603F1502TS, Description="Resistor, small US symbol", ki_fp_filters=R_*
R21: library part R_0603_1608Metric, "Resistor SMD 0603 (1608 Metric), square (rectangular) end terminal, IPC-7351 nominal, (Body size source: IPC-SM-782 page 72, https://www.pcb-3d.com/wordpress/wp-content/uploads/ipc-sm-782a_amendment_1_and_2.pdf), generated with kicad-footprint-generator", LCSC=C2907166, MFR P/N="FRC0603J472 TS", Description="Resistor, small US symbol", ki_fp_filters=R_*
R25: library part R_0603_1608Metric, "Resistor SMD 0603 (1608 Metric), square (rectangular) end terminal, IPC-7351 nominal, (Body size source: IPC-SM-782 page 72, https://www.pcb-3d.com/wordpress/wp-content/uploads/ipc-sm-782a_amendment_1_and_2.pdf), generated with kicad-footprint-generator", LCSC=C2907091, MFR P/N="FRC0603J100 TS", Description="Resistor, small US symbol", ki_fp_filters=R_*
REF**: library part Symbol_Barrel_Polarity, "Barrel connector polarity indicator"
TP10 TP11: library part TestPoint_Bridge_Pitch5.08mm_Drill1.3mm, "wire loop as test point, pitch 5.08mm, hole diameter 1.3mm, wire diameter 1.0mm", Description="test point (alternative shape)", ki_fp_filters="Pin* Test*"
U1: library part HSOP-8-1EP_3.9x4.9mm_P1.27mm_EP2.41x3.1mm_ThermalVias, "HSOP, 8 Pin (https://www.st.com/resource/en/datasheet/l5973d.pdf), generated with kicad-footprint-generator ipc_gullwing_generator.py", LCSC=C44377, MFR P/N=TPS54360DDAR, Datasheet=http://www.ti.com/lit/ds/symlink/tps54360.pdf, Description="3.5A, Step Down DC-DC Converter with Eco-mode, 4.5-60V Input Voltage, PowerSO-8", Absolute minimum=TPS54360DDA, Reference MFG P/N=C44377, ki_fp_filters=TI*SO*PowerPAD*ThermalVias*
U2: library part SSOP-10_3.9x4.9mm_P1.00mm, "10-Lead SSOP, 3.9 x 4.9mm body, 1.00mm pitch (http://www.st.com/resource/en/datasheet/viper01.pdf)", MFR P/N=CN3767, LCSC=C81968
U3: library part SOT-23, "SOT, 3 Pin (JEDEC TO-236 Var AB https://www.jedec.org/document_search?search_api_views_fulltext=TO-236), generated with kicad-footprint-generator ipc_gullwing_generator.py", LCSC=C23892, MFR P/N=TL431AIDBZR, Datasheet=http://www.ti.com/lit/ds/symlink/tl431.pdf, Description="Shunt Regulator, SOT-23", ki_fp_filters=SOT?23*
U4: library part SOIC-8_3.9x4.9mm_P1.27mm, "SOIC, 8 Pin (JEDEC MS-012AA, https://www.analog.com/media/en/package-pcb-resources/package/pkg_pdf/soic_narrow-r/r_8.pdf), generated with kicad-footprint-generator ipc_gullwing_generator.py", LCSC=C67470, MFR P/N=LM393DR, Datasheet=http://www.ti.com/lit/ds/symlink/lm393.pdf, Description="Low-Power, Low-Offset Voltage, Dual Comparators, DIP-8/SOIC-8/TO-99-8", ki_fp_filters="SOIC*3.9x4.9mm*P1.27mm* DIP*W7.62mm* SOP*5.28x5.23mm*P1.27mm* VSSOP*3x3mm*P0.65mm* TSSOP*4.4x3mm*P0.65mm*"

## Via types
v1: diameter 0.6, hole 0.3, F.Cu to B.Cu, tented both sides, 288 vias

## Nets (pads, with @x,y where several pads share a name; then routed paths per layer and width w, separated by ;. In a path a pad name is that pad's centre, name@x,y a point inside that pad or via, vN(x,y) a via of type N, cw(c..) or ccw(c..) an arc to the next point about the centre after c; other vN are vias at no path point)
+12V: C8.2 C9.2 C10.2 D6.2 L1.2 Q2.1 R5.1 R15.2 | length 5.9
  F.Cu w0.406: R5.1 161.375,13.525 v1(161.4,13.5)
  B.Cu w0.406: v1(156.7,13.7) 156.9,13.5 v1(161.4,13.5)
  other v1: 156.7,1.1 157.5,1.1 156.7,1.9 157.5,1.9 156.7,2.7 157.5,2.7 156.7,3.5 157.5,3.5 156.7,4.3 157.5,4.3 156.7,14.4 156.7,15.1 156.7,15.8 156.7,16.5 156.7,17.2 156.7,17.9 156.7,18.6
BAT+: F3.1 J3.1 TP10.1
GND: C1.1 C2.1 C3.1 C4.1 C6.2 C7.2 C8.1 C9.1 C10.1 C11.2 C12.2 C13.2 C15.2 C16.2 C17.2 C18.2 D1.2 D2.2 D5.3 H1.1 H2.1 H3.1 H4.1 J1.2 J2.2 J3.2 J4.2 Q3.2 R2.2 R3.2 R7.2 R11.2 R15.1 R19.2 R21.2 R24.2 TP11.1 U1.7 U1.9 U2.2 U3.3 U4.4
  other v1: 121.6,2.108 123.6,2.108 125.6,2.108 127.6,2.108 137.6,2.108 139.6,2.108 141.6,2.108 143.6,2.108 145.6,2.108 147.6,2.108 149.6,2.108 163.6,2.108 165.6,2.108 167.6,2.108 169.6,2.108 121.6,4.108 123.6,4.108 125.6,4.108 127.6,4.108 131.6,4.108 137.6,4.108 163.6,4.108 165.6,4.108 167.6,4.108 169.6,4.108 173.6,4.108 159.6,6.108 161.6,6.108 163.6,6.108 165.6,6.108 167.6,6.108 169.6,6.108 175.6,8.108 145.9,9.9 149.6,10.108 151.6,10.108 175.6,10.108 137.7,11.6 148.2,12 145.6,12.108 149.6,12.108 151.6,12.108 153.6,12.108 159.6,12.108 163.6,12.108 165.6,12.108 167.6,12.108 169.6,12.108 175.6,12.108 137.3,12.9 121.6,14.108 123.6,14.108 125.6,14.108 127.6,14.108 129.6,14.108 153.6,14.108 165.6,14.108 167.6,14.108 169.6,14.108 175.6,14.108 144.9,14.5 127.6,16.108 129.6,16.108 137.6,16.108 143.6,16.108 153.6,16.108 165.6,16.108 167.6,16.108 169.6,16.108 175.6,16.108 133,17.1 134.5,17.1 137.6,18.107 143,18.1 153.6,18.107 165.6,18.107 167.6,18.107 169.6,18.107 171.6,18.107 173.6,18.107 175.6,18.107 143,19.8 153.6,20.108 155.6,20.108 157.6,20.108 165.6,20.108 171.6,20.108 173.6,20.108 175.6,20.108 127.6,22.108 141.6,22.108 153.6,22.108 155.6,22.108 165.6,22.108 171.6,22.108 173.6,22.108 175.6,22.108 148.7,23 121.6,24.108 123.6,24.108 125.6,24.108 127.6,24.108 165.6,24.108 171.6,24.108 173.6,24.108 175.6,24.108 148.645,24.758 165.6,26.108 173.6,26.108 175.6,26.108 148.7,26.5 161.6,28.108 163.6,28.108 165.6,28.108 175.6,28.108 131.6,30.108 133.6,30.108 135.6,30.108 137.6,30.108 145.6,30.108 147.6,30.108 149.6,30.108 161.6,30.108 163.6,30.108 165.6,30.108 175.6,30.108 124.8,31 125.6,32.107 131.6,32.107 133.6,32.107 135.6,32.107 137.6,32.107 139.6,32.107 147.6,32.107 165.6,32.107 175.6,32.107 146.1,33.7 147.3,33.7 125.6,34.108 131.6,34.108 133.6,34.108 135.6,34.108 137.6,34.108 165.6,34.108 173.6,34.108 175.6,34.108 125.6,36.108 131.6,36.108 133.6,36.108 135.6,36.108 137.6,36.108 165.6,36.108 175.6,36.108 121.6,38.108 131.6,38.108 133.6,38.108 135.6,38.108 155.6,38.108 163.6,38.108 165.6,38.108 175.6,38.108 147.3,38.2 121.6,40.108 131.6,40.108 133.6,40.108 135.6,40.108 147.3,40.1 163.6,40.108 171.6,40.108 173.6,40.108 175.6,40.108 121.6,42.108 123.6,42.108 131.6,42.108 133.6,42.108 135.6,42.108 169.6,42.108 171.6,42.108 173.6,42.108 175.6,42.108 147.3,42.2 121.6,44.108 131.6,44.108 133.6,44.108 135.6,44.108 147.6,44.108 159.6,44.108 167.6,44.108 171.6,44.108 173.6,44.108 175.6,44.108 139.6,45 140.7,45 131.6,46.107 133.6,46.107 135.6,46.107 139.6,46.107 145.6,46.107 147.6,46.107 167.6,46.107 171.6,46.107 173.6,46.107 175.6,46.107 131.6,48.108 133.6,48.108 135.6,48.108 145.6,48.108 147.6,48.108 169.6,48.108 171.6,48.108 173.6,48.108 175.6,48.108 131.6,50.108 133.6,50.108 135.6,50.108 169.6,50.108 171.6,50.108 173.6,50.108 175.6,50.108 152.1,52.1 153.6,52.108 161.6,52.108 163.6,52.108 165.6,52.108 167.6,52.108 169.6,52.108 144.8,52.6 121.6,54.108 123.6,54.108 125.6,54.108 127.6,54.108 131.6,54.108 152.1,54.1 153.6,54.108 159.6,54.108 161.6,54.108 163.6,54.108 165.6,54.108 167.6,54.108 169.6,54.108 173.6,54.108 121.6,56.108 123.6,56.108 125.6,56.108 127.6,56.108 151.6,56.108 153.6,56.108 159.6,56.108 161.6,56.108 163.6,56.108 165.6,56.108 167.6,56.108 169.6,56.108
Net-(C6-Pad1): C6.1 R4.2 | length 1.5
  F.Cu w0.406: C6.1 R4.2
Net-(C15-Pad1): C15.1 R13.2 | length 1.6
  F.Cu w0.406: R13.2 159.25,39.008 C15.1
Net-(C19-Pad2): C19.2 Q4.1 Q4.2 Q4.3 Q5.1 Q5.2 Q5.3 R26.2 | length 4.3
  F.Cu w0.406: Q4.1 126.283,16.883 127.208,17.808 R26.2 128.05,17.858 C19.2
Net-(D1-K): C5.2 D1.1 L1.1 U1.8
Net-(D2-K): D2.1 JP1.3 R8.2 | length 7.5
  F.Cu w0.406: R8.2 v1(154.9,36.7) D2.1 ; JP1.3 155.543,32.243 v1(156.2,32.9)
  B.Cu w0.406: v1(154.9,36.7) 156.2,35.4 v1(156.2,32.9)
Net-(D3-A): D3.2 D4.2 R12.2 | length 4.2
  F.Cu w0.406: R12.2 160.25,31.175 D3.2 D4.2
Net-(D3-K): D3.1 U2.4 | length 13
  F.Cu w0.406: U2.4 156.5,41.863 156.937,42.3 158.879,42.3 161.7,39.479 161.7,35.4 161.3,35 D3.1
Net-(D4-K): D4.1 U2.3 | length 15.4
  F.Cu w0.406: U2.3 155.5,41.9 156.507,42.907 159.13,42.907 162.307,39.73 162.307,35.493 163.1,34.7 D4.1
Net-(D5-K): D5.2 L2.1
Net-(F3-Pad2): F3.2 Q5.5 Q5.6 Q5.7 Q5.8
Net-(JP1-A): JP1.1 R10.2 R11.1 | length 10.7
  F.Cu w0.406: JP1.1 152.4,30.7 153.3,29.8 155.4,29.8 156.4,30.8 156.4,32 157.225,32.825 R11.1 157.725,32.85 R10.2
Net-(JP1-C): JP1.2 U2.6 | length 20.3
  F.Cu w0.406: v1(153.7,31.1) JP1.2 ; U2.6 v1(157.5,47.5)
  B.Cu w0.406: v1(153.7,31.1) 153.7,41.9 155.9,44.1 157.5,45.7 v1(157.5,47.5)
Net-(Q1-D): D5.1 Q1.2
Net-(Q1-G): Q1.1 U2.10 | length 10.6
  F.Cu w0.406: Q1.1 147.408,49.7 v1(147.5,49.7) ; v1(153.5,45.2) U2.10
  B.Cu w0.406: v1(147.5,49.7) 149,49.7 v1(153.5,45.2)
Net-(Q1-S): C11.1 C12.1 C13.1 C14.1 F2.2 Q1.3 R8.1 R9.1 R12.1 U2.9 | length 21.9
  F.Cu w0.406: C12.1 151.8,45.458 151.8,40.4 152.425,39.775 C14.1 152.425,36.75 R8.1 152.375,34.9 R9.1 154.075,35.4 158.6,35.4 159.3,34.7 R12.1
Net-(Q3-D): Q3.3 R25.2 | length 1.9
  F.Cu w0.406: R25.2 Q3.3
Net-(Q3-G): Q3.1 R23.2 R24.1 | length 3.8
  F.Cu w0.406: R24.1 130.5,28.158 130.5,26.333 130.825,26.658 R23.2
Net-(Q4-G): C19.1 Q4.4 Q5.4 R25.1 R26.1 | length 13.8
  F.Cu w0.406: v1(121.2,16.9) 121.217,16.883 Q4.4 ; Q5.4 125.77,20.13 v1(126.443,19.458) R26.1 129.55,19.458 C19.1 R25.1
  B.Cu w0.406: v1(121.2,16.9) 123.757,19.458 v1(126.443,19.458)
Net-(R5-Pad2): R5.2 R6.1 | length 1.7
  F.Cu w0.406: R5.2 R6.1
Net-(R10-Pad1): R9.2 R10.1 | length 1.4
  F.Cu w0.406: R9.2 R10.1
Net-(R22-Pad2): R22.2 R23.1 U4.1 | length 10.3
  F.Cu w0.406: R23.1 132.208,25 v1(133.4,25) ; U4.1 v1(137.4,19.533) R22.2
  B.Cu w0.406: v1(133.4,25) 137.4,21 v1(137.4,19.533)
Net-(U1-BOOT): C5.1 U1.1 | length 2
  F.Cu w0.406: U1.1 151.675,22.473 C5.1
Net-(U1-COMP): C7.1 R4.1 U1.6 | length 6.3
  F.Cu w0.406: C7.1 141.5,26.3 142.282,27.083 R4.1 143.117,27.083 144.808,25.393 U1.6
Net-(U1-EN): R1.2 R2.1 U1.3 | length 9.5
  F.Cu w0.406: U1.3 152.092,25.393 152.6,25.9 152.6,27.7 153.7,28.8 155.4,28.8 155.95,28.25 R1.2 R2.1
Net-(U1-FB): R6.2 R7.1 U1.5 | length 23.5
  F.Cu w0.406: U1.5 146,26.668 v1(146,27.6) ; R6.2 v1(161.375,17.2) R7.1
  B.Cu w0.406: v1(146,27.6) 153,27.6 161.4,19.2 161.4,17.225 v1(161.375,17.2)
Net-(U1-RT{slash}CLK): R3.1 U1.4 | length 1.7
  F.Cu w0.406: U1.4 151.295,28.37 R3.1
Net-(U1-VIN): C1.2 C2.2 C3.2 C4.2 F1.2 R1.1 U1.2 | length 5.9
  F.Cu w0.406: U1.2 152.478,24.123 152.5,24.1 153.207,24.807 153.207,27.207 153.658,27.658 R1.1
Net-(U2-COM): R13.1 U2.5 | length 2.2
  F.Cu w0.406: U2.5 157.5,39.108 R13.1
Net-(U2-CSP): L2.2 R14.1 U2.8 | length 15.2
  F.Cu w0.406: U2.8 v1(155.5,47.5)
  B.Cu w0.406: v1(150.3,36.9) 150.3,42.6 151.8,44.1 154,44.1 155.5,45.6 v1(155.5,47.5)
Net-(U2-VG): C14.2 U2.1 | length 3.1
  F.Cu w0.406: U2.1 153.5,39.8 153.975,39.325 C14.2
Net-(U3-K): R16.2 U3.1 U3.2 U4.2 | length 9.7
  F.Cu w0.406: U3.1 U3.2 134.462,25.338 134.5,25.3 134.532,25.3 R16.2 136.1,23.733 136.1,21.7 135.135,20.735 U4.2
Net-(U4A-+): R20.2 R21.1 U4.3 | length 4.8
  F.Cu w0.406: U4.3 133.865,22.818 R21.1 R20.2
Net-(U4B-+): R17.2 R18.1 U4.5 | length 4.4
  F.Cu w0.406: R17.2 R18.1 132.595,12.503 U4.5
Net-(U4B--): R18.2 R19.1 U4.6 | length 4.3
  F.Cu w0.406: U4.6 133.865,12.123 R18.2 R19.1
OUTBP: D6.1 J4.1 Q2.3
P+: C16.1 C17.1 C18.1 Q2.2 Q4.5 Q4.6 Q4.7 Q4.8 R14.2 R16.1 R17.1 R20.1 R22.1 U2.7 U4.8 | length 35
  F.Cu w0.406: U4.8 138.15,14.583 C18.1 139.8,14.333 139.8,19.783 R22.1 ; U2.7 v1(156.5,47.5)
  B.Cu w0.406: v1(143.1,35.9) 150.5,35.9 151,36.4 151.1,36.5 151.1,37.307 150.907,37.5 150.907,38.4 150.907,42.348 151.179,42.621 152.052,43.493 152.8,43.493 154.252,43.493 155.752,44.993 156.5,45.741 v1(156.5,47.5)
unconnected-(J1-Pad3): J1.3
unconnected-(U4-Pad7): U4.7
VIN: F1.1 F2.1 J1.1 J2.1
pads on no net: D5.Un1 D5.Un2 D5.Un3 D5.Un4 Q1.Un1 Q1.Un2 Q1.Un3 Q1.Un4 U1.Un1 U1.Un2 U1.Un3 U1.Un4

## Polygon pours and split planes (outlines as drawn)
GND on F.Cu "F.Cu-GND" (solid, remove dead copper, pour order 37): 119.7,58 177.7,58 177.8,57.9 177.8,0 119.7,0 119.6,0.1 119.6,57.9
VIN on F.Cu "F.Cu-/Buck/VIN-2" (solid, remove dead copper, pour order 32): 168.2,31.1 169.3,32.2 173.5,32.2 173.8,31.9 173.8,29.4 170.7,26.3 170.7,21.6 169.9,20.8 168.5,20.8 168.2,21.1
Net-(U2-CSP) on F.Cu "F.Cu-Net-(U2-CSP)" (solid, remove dead copper, pour order 31): 149.1,43.4 150.7,43.4 150.8,43.3 150.8,33.1 150.5,32.8 149.6,32.8 148.4,34 148.4,42.7
P+ on F.Cu "F.Cu-/Battery Protect/P+-1" (solid, remove dead copper, pour order 30): 156,5.8 156,7 155.9,7.1 151.6,7.1 150.5,8.2 140,8.2 137.9,10.3 131,10.3 129,12.3 121.7,12.3 121.7,10.3 122.6,9.4 128.1,9.4 129.6,7.9 135.5,7.9 138.9,4.5 150.5,4.5 151.6,5.6 155.8,5.6
+12V on F.Cu "F.Cu-+12V-1" (solid, remove dead copper, pour order 33): 154.7,13.4 154.7,19 158.1,19 158.1,13.4
+12V on F.Cu "F.Cu-+12V" (solid, remove dead copper, pour order 29): 161.9,0.8 161.9,2.8 160,4.7 153.9,4.7 153,3.8 153,1.5 153.8,0.7 161.8,0.7
VIN on F.Cu "F.Cu-/Buck/VIN-1" (solid, remove dead copper, pour order 28): 162.6,42.8 168.2,37.2 168.2,31 169,30.2 173.5,30.2 173.8,30.5 173.8,31.9 172.9,32.8 171.7,32.8 171.1,33.4 171.1,37.7 165.1,43.7 165.1,46.6 164.4,47.3 162.7,47.3 162.6,47.2
Net-(Q1-S) on F.Cu "F.Cu-Net-(Q1-S)-1" (solid, remove dead copper, pour order 27): 150.4,51 150.4,56.1 145.7,56.1 145.4,55.8 145.4,54.1 148.6,50.9 150.3,50.9
Net-(Q1-D) on F.Cu "F.Cu-Net-(Q1-D)" (solid, remove dead copper, pour order 26): 137.1,55.9 143,55.9 143.2,55.7 143.2,46.4 142.7,45.9 141.8,45.9 137.1,50.6
VIN on F.Cu "F.Cu-/Buck/VIN" (solid, remove dead copper, pour order 25): 164.4,47.3 158.7,53 158.7,55.3 157.8,56.2 155.6,56.2 155.4,56 155.4,51.2 160.7,45.9 160.7,44.7 162.6,42.8 164.3,42.8 164.4,42.9
P+ on F.Cu "F.Cu-/Battery Protect/P+" (solid, remove dead copper, pour order 24): 141.7,36.2 141.6,36.1 141.6,30.8 136.7,25.9 136.7,22.7 139.2,20.2 139.2,11.6 137.9,10.3 137.9,8.6 139.9,6.6 141.3,6.6 142.9,8.2 142.9,14.3 141.5,15.7 141.5,20.6 139.4,22.7 139.4,25.6 144.9,31.1 144.9,36.2
Net-(Q1-S) on F.Cu "F.Cu-Net-(Q1-S)" (solid, remove dead copper, pour order 23): 154.7,45.9 154.7,49.2 153.9,50 151.8,50 151.1,50.7 151.1,54.8 149.8,56.1 149.2,56.1 148.3,55.2 148.3,51.2 149.5,50 150,50 150.4,49.6 150.4,45.8 150.7,45.5 151.9,45.5 152.6,46.2 152.6,47.2 153.1,47.7 153.8,47.7 154.3,47.2 154.3,45.9
Net-(D5-K) on F.Cu "F.Cu-Net-(D5-K)" (solid, remove dead copper, pour order 36): 137.2,43.8 145.5,43.8 146,43.3 146,37.7 145.7,37.4 137.6,37.4 137.1,37.9 137.1,43.7
Net-(F3-Pad2) on F.Cu "F.Cu-Net-(F3-Pad2)" (solid, remove dead copper, pour order 35): 121.7,25.8 121.7,28.6 121,29.3 121,35.5 121.2,35.7 122.7,35.7 123.8,34.6 123.8,30.5 126,28.3 126,26 125.8,25.8
Net-(U1-VIN) on F.Cu "F.Cu-Net-(U1-VIN)" (solid, remove dead copper, pour order 22): 163.2,26.1 161.5,26.1 160,24.6 152.2,24.6 152,24.4 150.6,24.4 150.6,23.8 152,23.8 152.2,23.6 155.9,23.6 158.8,20.7 161.9,20.7 163.2,22
Net-(C19-Pad2) on F.Cu "F.Cu-Net-(C19-Pad2)" (solid, remove dead copper, pour order 21): 123,18.4 121.7,19.7 121.7,22 124.7,22 124.7,19.7 126,18.4 126,16.1 123,16.1
Net-(D1-K) on F.Cu "F.Cu-Net-(D1-K)" (solid, remove dead copper, pour order 20): 145.1,23.1 144.6,22.6 144.6,20.7 144.4,20.5 144.4,17.9 148.9,13.4 151.2,13.4 151.6,13.8 151.6,19.7 149.7,21.6 148.1,21.6 146.7,23 146.7,23.1
OUTBP on F.Cu "F.Cu-/ByPass/OUTBP" (solid, remove dead copper, pour order 19): 154.5,9.3 158.3,9.3 158.8,9.8 166.8,9.8 166.9,9.7 170,9.7 171.9,11.6 173.7,11.6 173.8,11.5 173.8,9.858 171.442,7.5 156.5,7.5 156,8 154.6,8 154.5,8.1 154.5,9.3
BAT+ on F.Cu "F.Cu-/Battery Protect/BAT+" (solid, remove dead copper, pour order 18): 129.6,30.5 129.6,49.8 127.1,52.3 121.1,52.3 120.5,51.7 120.5,47 123.9,43.6 125.4,43.6 126.5,42.5 126.5,31.2 127.5,30.2 129.3,30.2
+12V on B.Cu "B.Cu-+12V" (solid, remove dead copper, pour order 34): 155.8,19 155.8,1.2 156.2,0.8 157.7,0.8 158.1,1.2 158.1,18.8 157.8,19.1 155.9,19.1
GND on B.Cu "B.Cu-GND" (solid, remove dead copper, pour order 38): 119.7,58 177.7,58 177.8,57.9 177.8,0 119.7,0 119.6,0.1 119.6,57.9

## Silkscreen, mask and mechanical layers (free items; w line width, h text height)
F.SilkS:
  lines w0.254: 119.7,9.658 137.9,9.658 140.05,11.807 ; 119.7,29.358 137.9,29.358 140.05,27.208 ; 136.1,58.058 136.1,35.458 142.2,29.358 ; 147.5,0.058 147.5,9.568 148.6,10.668 163.2,10.668 164.41,9.458 164.4,0.058 ; 153.8,29.4 153.8,30.9 ; 158.9,58.058 158.9,42.658 164.5,37.058 164.5,30.158 163.7,29.358 ; 140.05,11.807 141.2,10.658 163.2,10.658 164.5,11.968 164.5,15.758 164.5,27.758 164.5,28.558 163.7,29.358 ; 140.05,11.807 140.05,27.208 ; 140.05,27.208 142.2,29.358 ; 142.2,29.358 162.9,29.358 163.7,29.358 ; 150.7,29.4 150.7,30.7 150.7,30.9 156.8,30.9 156.8,29.4 150.7,29.4
  text "25V/3A Max" at 160.2,54.086 h1
  text "-" at 161.2,52.558 h1
  text "BAT+" at 119.6,52.358 h1
  text "+" at 167.2,52.129 h1
  text "For evaluation Only,  / not FCC approved for resale" at 135.308,49.9 h0.61 r90
  text "12V Lead Acid" at 132.424,47.358 h1 r90
  text "+ BAT -" at 130.9,45.258 h1 r90
  text "INPUT" at 162,42.558 h1 r90
  text "CHARGER" at 135.636,35.211 h1 r135
  text "DO" at 159.7,34.1 h1
  text "CH" at 162,34.1 h1
  text "+ VIN -" at 168,30.258 h1 r90
  text "MPPT" at 150.9,29.395 h0.61
  text "NORM" at 153.9,29.395 h0.61
  text "INPUT" at 172.6,25.958 h1
  text "12V/2A" at 171.4,19.886 h1
  text "OUPUT" at 172,18.358 h1
  text "+ OUT -" at 168,9.458 h1 r90
  text "BUCK" at 140.8,8.658 h1
  text "PROTECT" at 131.1,7.658 h1
  text "94V-0 / E479892 / JLC-2" at 169.114,4.632 h0.61 r90
  text "Electgpl" at 135.975,4.091 h1.63
  text "Lead Acid miniUPS" at 136.3,3.781 h0.61
  text "BAT-" at 119.6,3.058 h1
  text "ARGENTINA DESIGN" at 136.3,2.595 h0.61
  text "ByPass" at 148.367,1.958 h1 r90
  text "2523" at 168.569,0.976 h0.71 r90
Edge.Cuts:
  lines w0.254: 119.7,2.058 ccw(c121.7,2.057) 121.7,0.058 175.7,0.058 ccw(c175.7,2.057) 177.7,2.058 177.7,56.058 ccw(c175.7,56.058) 175.7,58.058 121.7,58.058 ccw(c121.7,56.058) 119.7,56.058 119.7,2.058